# Altium PCB Phoenix ME MAX 22.5 2-2 KMGY.PcbDoc
Units mm, origin at the board's own origin, x right, y up, seen from the top; angles counter-clockwise.
Board outline 98 x 150 mm, 2 copper layers (Top Layer, Bottom Layer); 5 components, 0 nets, 22 pads, 0 vias.
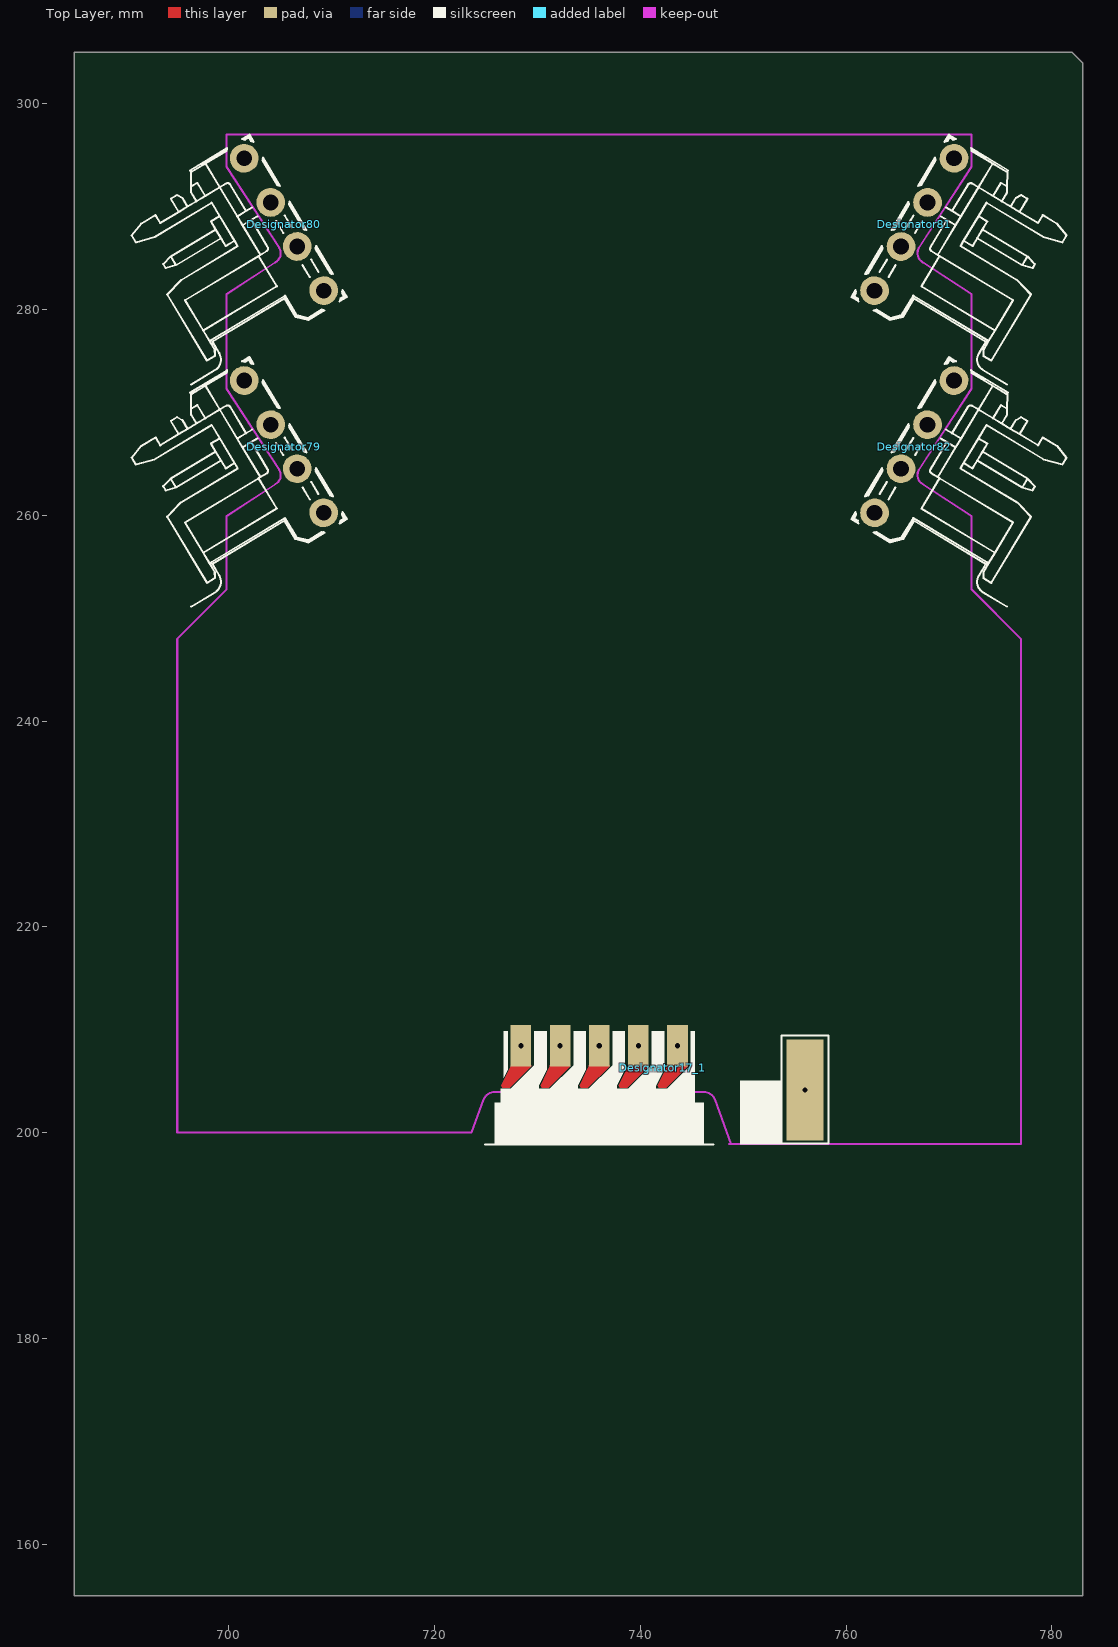
[diagram p0: Top Layer view]
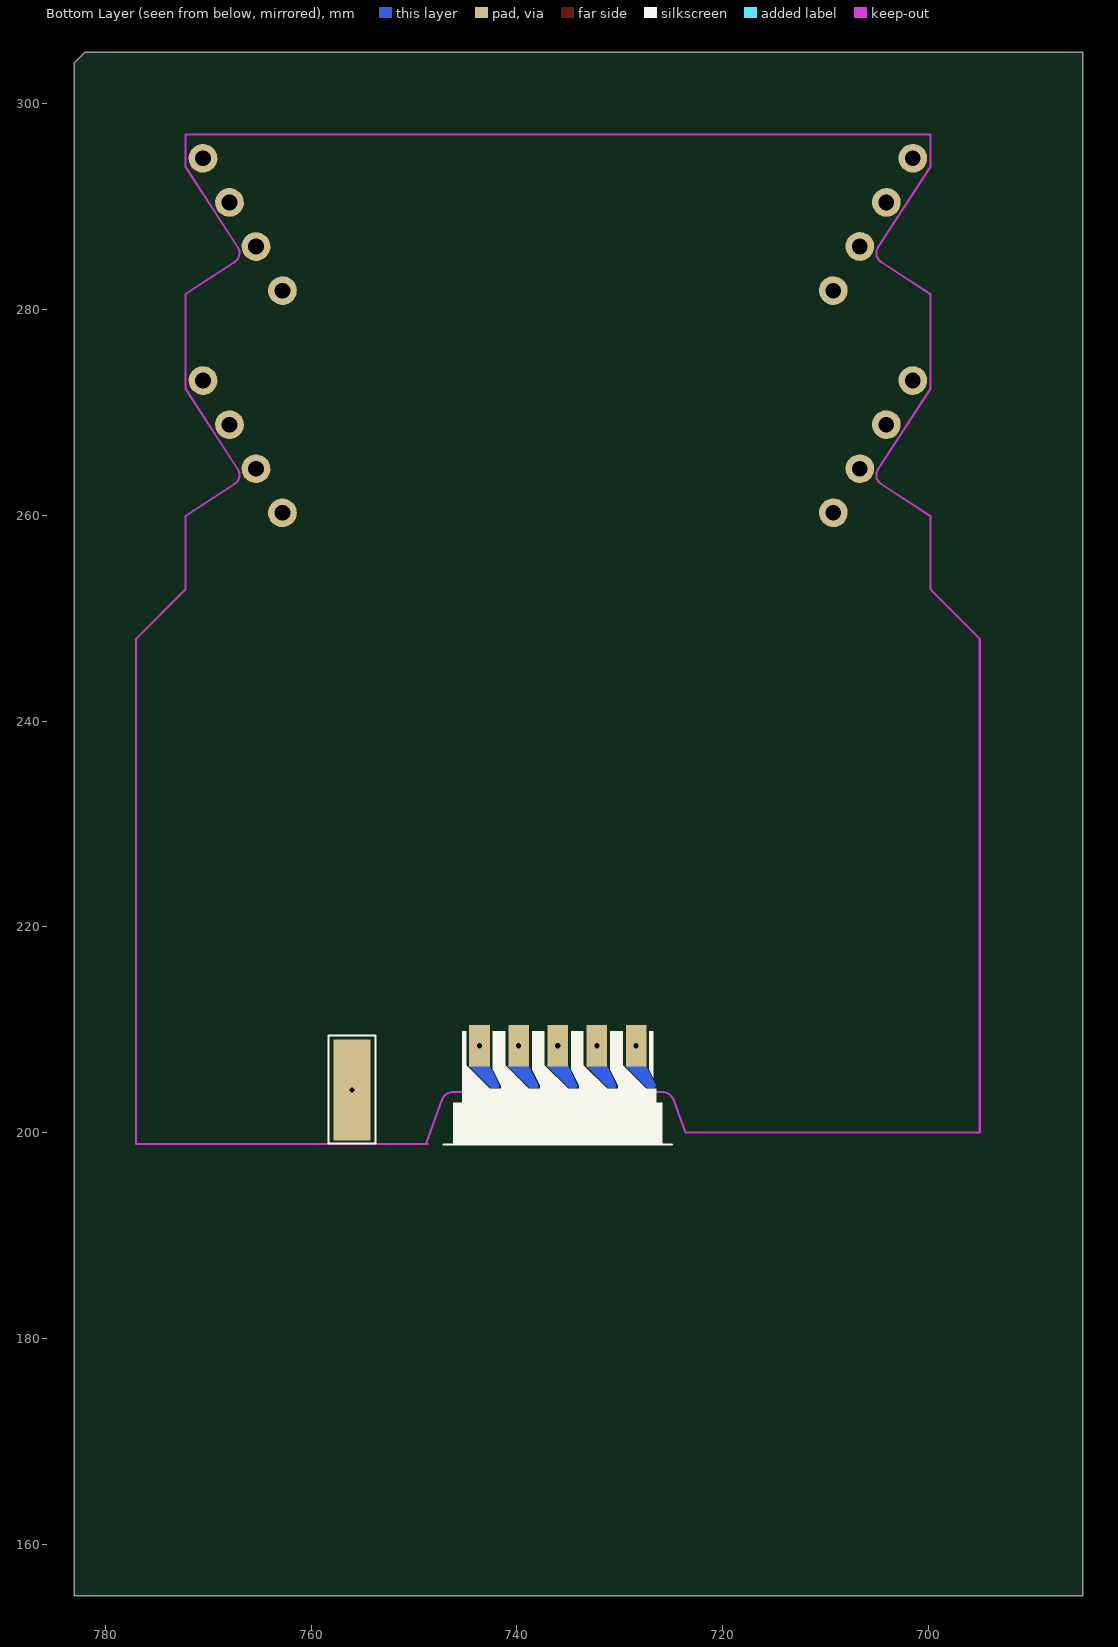
[diagram p1: Bottom Layer view, seen from below]

## Layer stack, top to bottom
Top Layer: signal copper 0.0356
Dielectric: dielectric 0.32, FR-4, Dk 4.8
Bottom Layer: signal copper 0.0356

## Board outline
685,305 685,155 783,155 783,304 782,305

## Design rules (kind name [scope] priority, off if disabled: settings)
Clearance [All] p1: gap=0.254
PolygonConnect [All] p1: connectstyle=Relief reliefconductorwidth=0.254 reliefentries=4 polygonreliefangle="90 Angle"
RoutingVias [All] p1: holewidth=0.711 width=1.27 viastyle="Through Hole" minholewidth=0.711 minwidth=1.27 maxholewidth=0.711 maxwidth=1.27
SilkscreenOverComponentPads [All] p1: minsilkscreentomaskgap=0.254
SolderMaskExpansion [All] p1: expansion=0.102
Width [All] p1: maxlimit=0.254 minlimit=0.254 preferedwidth=0.254
27 further rules are at their usual default settings.

## Components (designator, comment, footprint, x,y, rotation, side; value= is the part's Value field where it differs from the comment)
Designator17_1 "Comment" "ME22.5 TBUS1.5/5" 736.019,203.95 r0 top locked
Designator79 "Comment" MSTBO2.5/4-G1L 701.502,273.101 r31 top locked
Designator80 "Comment" MSTBO2.5/4-G1L 701.502,294.701 r31 top locked
Designator81 "Comment" MSTBO2.5/4-G1R 770.5,294.7 r329 top locked
Designator82 "Comment" MSTBO2.5/4-G1R 770.5,273.1 r329 top locked

## Footprints (in the part's own frame and the unit in brackets; to place one, negate y for a bottom-side part, rotate by r counter-clockwise, add the part's x,y. Pads: shape width x height; smd on the part's side, far side on the other; paste and mask are expansions set on the pad)
"ME22.5 TBUS1.5/5" [mm]
  rect 2x4 hole 0.5: 1(-7.62,4.5) 2(-3.81,4.5) 3(0,4.5) 4(3.8,4.5) 5(7.6,4.5)
  rect 3.6x9.8 hole 0.5: 6(20,0.2)
  Top Layer region: 1,2.6 1,2.5 -1.1,0.4 -1.8,0.4 -1.9,0.6 -1,2.5 -1,2.6
  Top Layer region: 4.8,2.6 4.8,2.5 2.7,0.4 2,0.4 1.9,0.6 2.8,2.5 2.8,2.6
  Top Layer region: 8.6,2.6 8.6,2.5 6.5,0.4 5.8,0.4 5.7,0.6 6.6,2.5 6.6,2.6
  Top Layer region: -2.81,2.6 -2.81,2.5 -4.91,0.4 -5.61,0.4 -5.71,0.6 -4.81,2.5 -4.81,2.6
  Top Layer region: -6.62,2.6 -6.62,2.5 -8.72,0.4 -9.42,0.4 -9.52,0.6 -8.62,2.5 -8.62,2.6
  Bottom Layer region: 1,2.6 1,2.5 -1.1,0.4 -1.8,0.4 -1.9,0.6 -1,2.5 -1,2.6
  Bottom Layer region: 4.8,2.6 4.8,2.5 2.7,0.4 2,0.4 1.9,0.6 2.8,2.5 2.8,2.6
  Bottom Layer region: 8.6,2.6 8.6,2.5 6.5,0.4 5.8,0.4 5.7,0.6 6.6,2.5 6.6,2.6
  Bottom Layer region: -2.81,2.6 -2.81,2.5 -4.91,0.4 -5.61,0.4 -5.71,0.6 -4.81,2.5 -4.81,2.6
  Bottom Layer region: -6.62,2.6 -6.62,2.5 -8.72,0.4 -9.42,0.4 -9.52,0.6 -8.62,2.5 -8.62,2.6
  Keep-Out Layer lines w0.2: -23,-3.95 -12.419,-3.95 -11.247,-0.729 ; -11.244,-0.73 cw(c-10.14,-1.2) -10.14,0 ; -10.1,0 10.1,0 ; 10.14,0.002 cw(c10.14,-1.198) 11.244,-0.728 ; 11.242,-0.728 12.8,-5.05 23,-5.05
  silkscreen extent -11.1,-5.2 22.3,5.9
MSTBO2.5/4-G1L [mil]
  round 110 hole 60: 1(0,-196.85) 2(0,-393.7) 3(0,0) 4(0,-590.55)
  silkscreen extent -619,-657 64,67
MSTBO2.5/4-G1R [mil]
  round 110 hole 60: 1(0,-196.85) 2(0,0) 3(0,-393.7) 4(0,-590.55)
  silkscreen extent -64,-657 619,67

## Nets (pads, with @x,y where several pads share a name; then routed paths per layer and width w, separated by ;. In a path a pad name is that pad's centre, name@x,y a point inside that pad or via, vN(x,y) a via of type N, cw(c..) or ccw(c..) an arc to the next point about the centre after c; other vN are vias at no path point)
pads on no net: Designator17_1.1 Designator17_1.2 Designator17_1.3 Designator17_1.4 Designator17_1.5 Designator17_1.6 Designator79.1 Designator79.2 Designator79.3 Designator79.4 Designator80.1 Designator80.2 Designator80.3 Designator80.4 Designator81.1 Designator81.2 Designator81.3 Designator81.4 Designator82.1 Designator82.2 Designator82.3 Designator82.4

## Keep-outs
Keep-Out Layer:
  lines w0.2: 704.55,263.034 ccw(c704.05,263.9) 704.916,264.4 ; 704.55,284.609 ccw(c704.05,285.475) 704.916,285.975 ; 704.554,263.028 699.8,259.945 699.8,252.8 695,248 695,220.094 695,200 723.4,200 ; 704.554,284.603 699.8,281.52 699.8,272.308 704.926,264.407 ; 704.926,285.982 699.8,293.883 699.8,297 772.2,297 772.2,293.883 767.074,285.982 ; 748.65,198.9 777,198.9 777,248 772.2,252.8 772.2,259.945 767.446,263.028 ; 767.074,264.407 772.2,272.308 772.2,281.52 767.446,284.603 ; 767.084,264.4 ccw(c767.95,263.9) 767.45,263.034 ; 767.084,285.975 ccw(c767.95,285.475) 767.45,284.609

## Silkscreen, mask and mechanical layers (free items; w line width, h text height)
Mechanical 15:
  lines w0.1: 704.55,263.034 ccw(c704.05,263.9) 704.916,264.4 ; 704.55,284.609 ccw(c704.05,285.475) 704.916,285.975 ; 704.554,263.028 699.8,259.945 699.8,252.8 695,248 695,220.094 695,200 723.4,200 ; 704.554,284.603 699.8,281.52 699.8,272.308 704.926,264.407 ; 704.926,285.982 699.8,293.883 699.8,297 772.2,297 772.2,293.883 767.074,285.982 ; 723.41,200 724.582,203.321 ; 724.585,203.32 cw(c725.689,202.85) 725.689,204.05 745.927,204.05 ; 745.927,204.052 cw(c745.927,202.852) 747.032,203.322 748.629,198.9 ; 748.65,198.9 777,198.9 777,248 772.2,252.8 772.2,259.945 767.446,263.028 ; 767.074,264.407 772.2,272.308 772.2,281.52 767.446,284.603 ; 767.084,264.4 ccw(c767.95,263.9) 767.45,263.034 ; 767.084,285.975 ccw(c767.95,285.475) 767.45,284.609

## Dimensions
773,297 to 773,273.1 on Mechanical 1
773,297 to 773.9,294.7 on Mechanical 1
770,298 to 702,298 on Mechanical 1
695,199 to 777,198 on Mechanical 1
700,298 to 772,298 on Mechanical 1
699,297 to 699,293.6 on Mechanical 1
699,297 to 698.9,281.65 on Mechanical 1
699,297 to 699,272 on Mechanical 1
699,297 to 699,260.05 on Mechanical 1
699,297 to 694,200 on Mechanical 1